# Altium PCB PCB1.PcbDoc
Units mm, origin at the board's own origin, x right, y up, seen from the top; angles counter-clockwise.
Board outline 105 x 81.5 mm, 2 copper layers (Top Layer, Bottom Layer); 36 components, 25 nets, 105 pads, 22 vias.
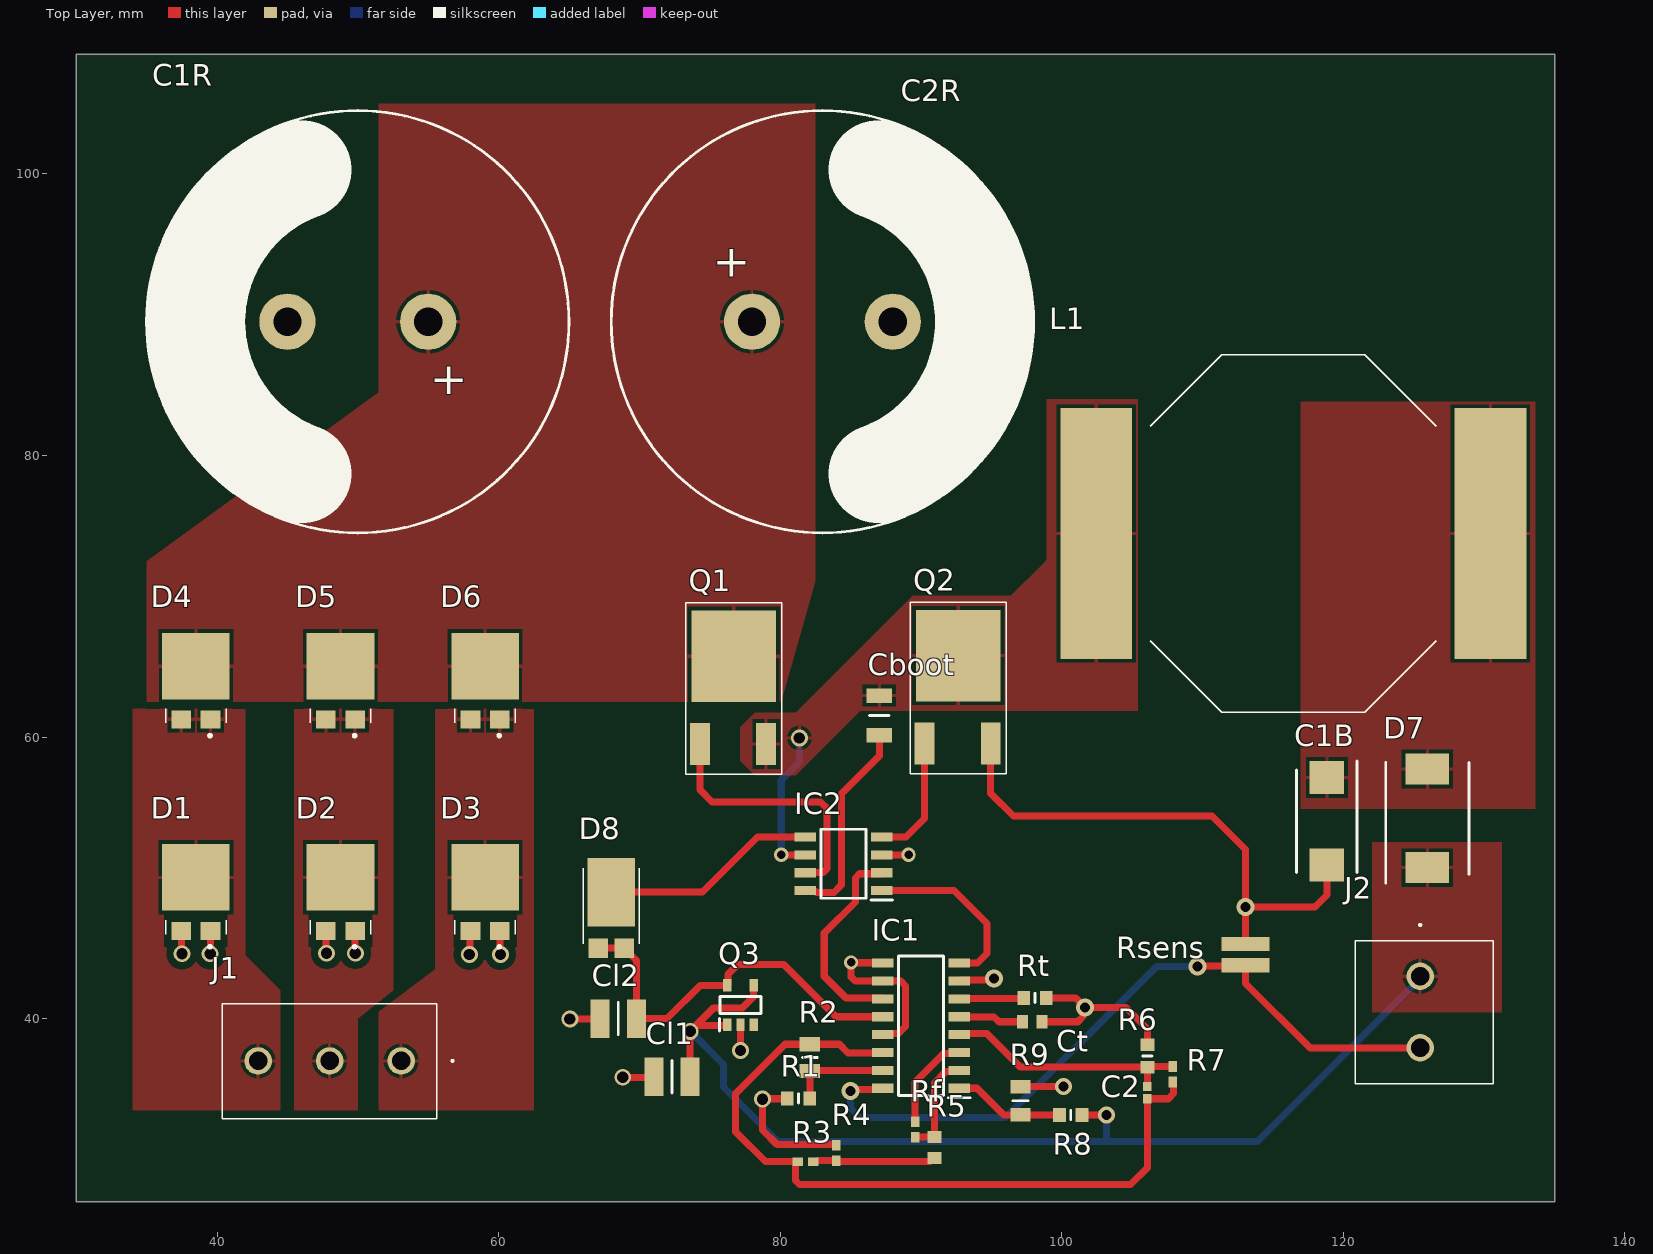
[diagram p0: Top Layer view]
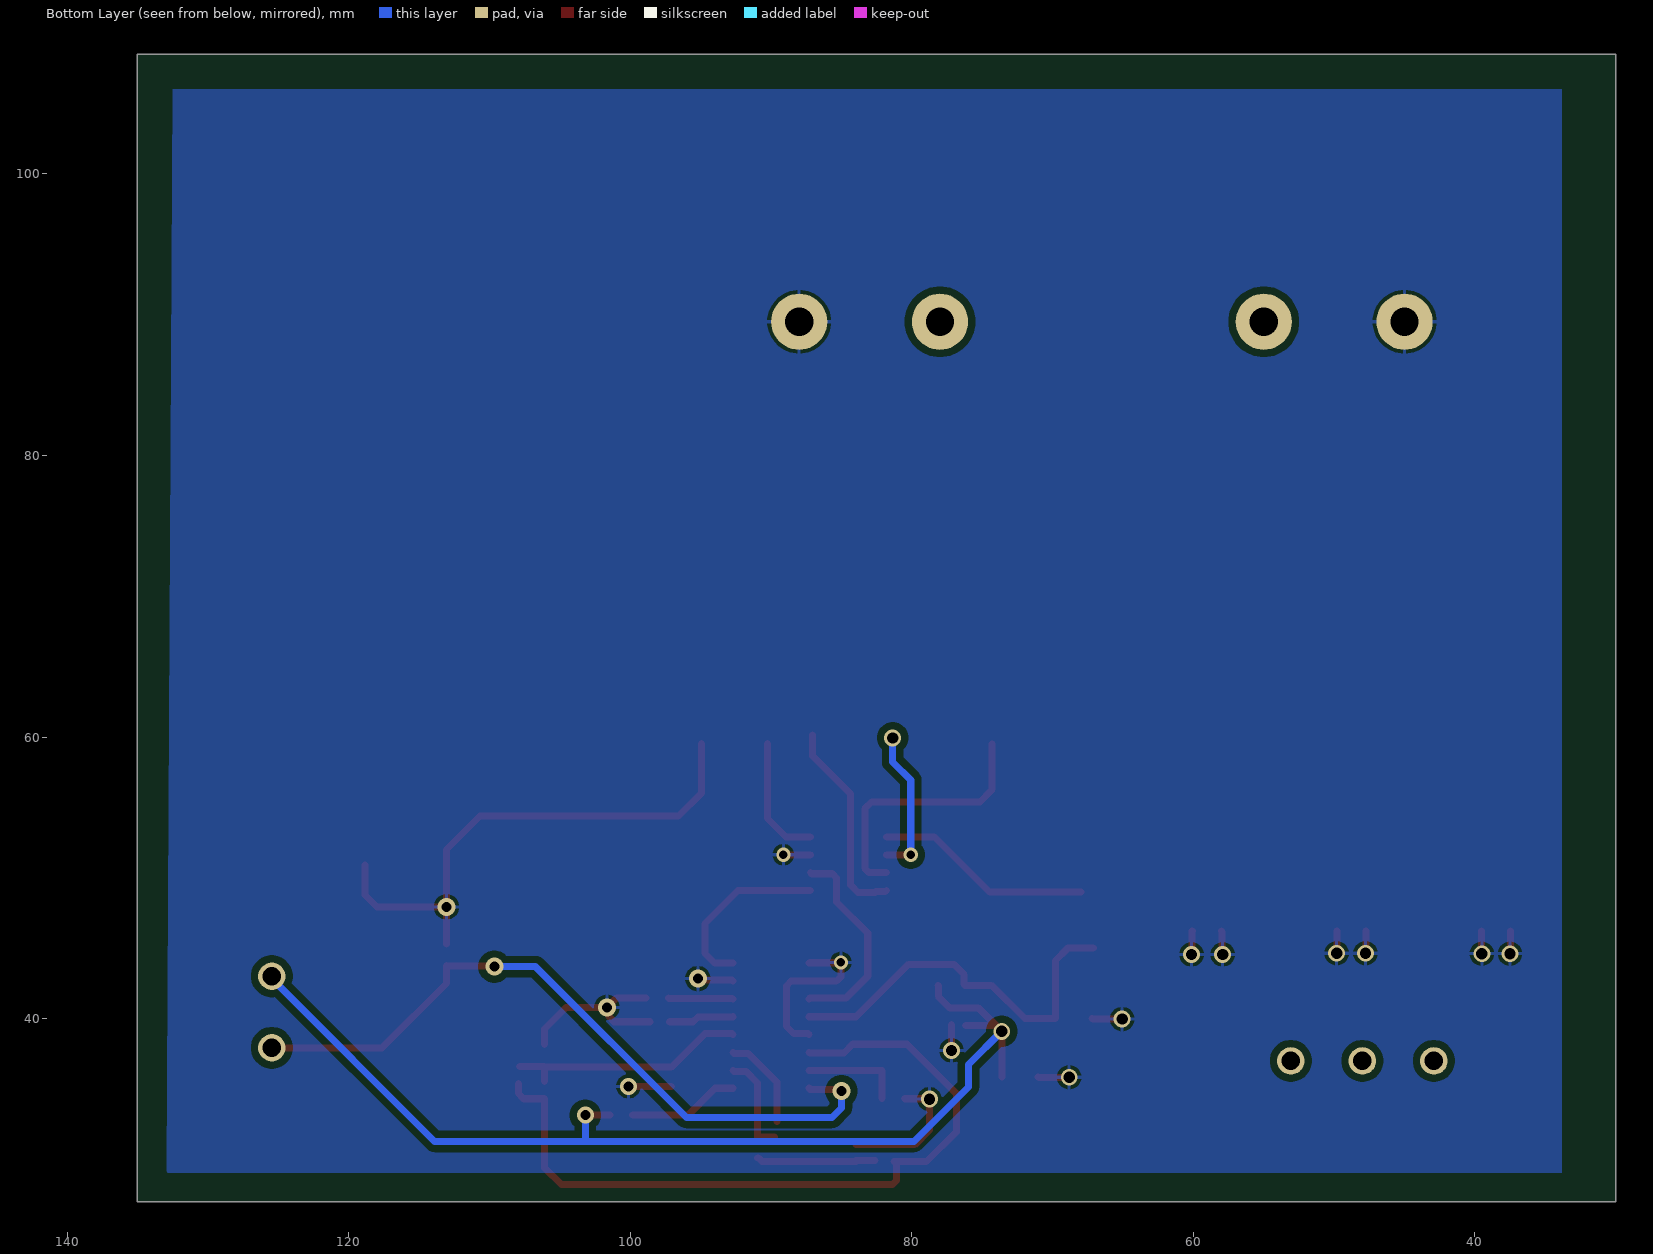
[diagram p1: Bottom Layer view, seen from below]
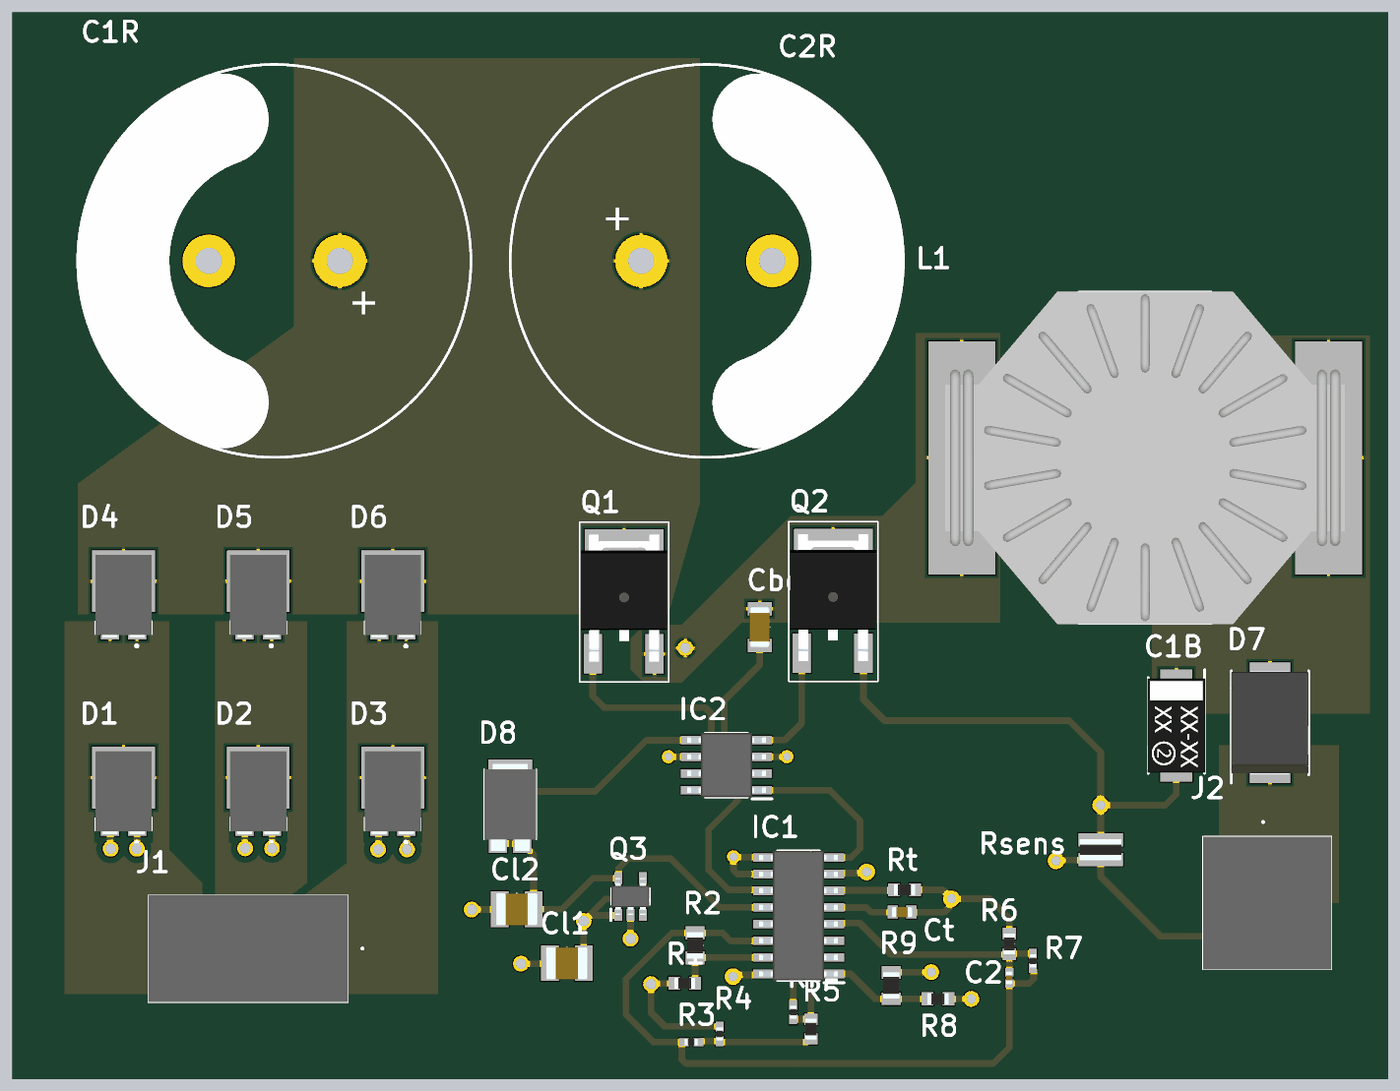
[diagram p2: 3D render of the assembled board from above, using the file's embedded part models]

## Layer stack, top to bottom
Top Solder: solder mask 0.0102, Solder Resist, Dk 3.5
Top Layer: signal copper 0.0356
Dielectric 1: dielectric 0.32, FR-4, Dk 4.8
Bottom Layer: signal copper 0.0356
Bottom Solder: solder mask 0.0102, Solder Resist, Dk 3.5

## Board outline
30,27 135,27 135,108.5 30,108.5

## Design rules (kind name [scope] priority, off if disabled: settings)
Clearance [All] p1: gap=0.5 ignorepadtopadclearanceinfootprint=FALSE
PolygonConnect [All] p1: connectstyle=Relief reliefconductorwidth=0.254 reliefentries=4 polygonreliefangle="90 Angle" airgapwidth=0.254
RoomDefinition Converter [InComponentClass('Converter')] p1: confinementstyle=ConfineIn formatcopy=TRUE lockcomponents=FALSE outline 190.846,87.63 319.151,87.63 319.151,144.78 190.846,144.78
RoomDefinition Controller [InComponentClass('Controller')] p2: confinementstyle=ConfineIn formatcopy=TRUE lockcomponents=FALSE outline 182.663,19.939 208.571,19.939 208.571,36.449 182.663,36.449
RoomDefinition Rectifier [InComponentClass('Rectifier')] p3: confinementstyle=ConfineIn formatcopy=TRUE lockcomponents=FALSE outline 216.431,5.564 324.604,5.564 324.604,66.847 216.431,66.847
RoutingVias [All] p1: holewidth=0.6 width=0.8 viastyle="Through Hole" minholewidth=0.6 minwidth=0.8 maxholewidth=0.6 maxwidth=0.8
SolderMaskExpansion [All] p1: expansion=0.102 istentingtop=FALSE
Width Width_S [All] p1: maxlimit=1 minlimit=0.3 preferedwidth=0.5
Width [All] p2: maxlimit=1.3 minlimit=0.7 preferedwidth=1
30 further rules are at their usual default settings.

## Classes and differential pairs
component class Converter: C1B D7 J2 L1 Q1 Q2 Rsens
component class Controller: C2 Cboot Cl1 Cl2 Ct D8 IC1 IC2 Q3 R1 R2 R3 R4 R5 R6 R7 R8 R9 Rf Rt
component class Rectifier: C1R C2R D1 D2 D3 D4 D5 D6 J1

## Components (designator, comment, footprint, x,y, rotation, side; value= is the part's Value field where it differs from the comment)
C1B "293D155X0050D2TE3" CAPPM7343X310N 118.83,54.02 r270 top
C1R "470uF" 450MXH270MEFCSN30X30 50,89.5 r180 top
C2 "2.2u" CAPC1005X55N 106.08,34.75 r90 top
C2R "470uF" 450MXH270MEFCSN30X30 83,89.5 r0 top
Cboot "12065D106KAT2A" CAPC3216X229N 87.04,61.54 r90 top
Cl1 "1u" CAPC3225X105N 72.32,35.87 r180 top
Cl2 "1u" CAPC3225X105N 68.5,40 r180 top
Ct "1nF" CAPC1608X90N 97.9,39.78 r0 top
D1 "AS4PJ-M3_86A" V10PN50M387A 38.5,49 r0 top
D2 "AS4PJ-M3_86A" V10PN50M387A 48.77,49 r0 top
D3 "AS4PJ-M3_86A" V10PN50M387A 59.04,49 r0 top
D4 "AS4PJ-M3_86A" V10PN50M387A 38.5,64 r0 top
D5 "AS4PJ-M3_86A" V10PN50M387A 48.77,64 r0 top
D6 "AS4PJ-M3_86A" V10PN50M387A 59.04,64 r0 top
D7 "ES3A-13-F" DIOM7959X250N 125.97,54.23 r90 top
D8 "SBR3U60P5-7" SBR3U60P57 68,47 r0 top
IC1 "TL594IDR" SOIC127P600X175-16N 90,39.5 r180 top
IC2 "NCP5181DR2G" SOIC127P600X175-8N 84.5,51 r180 top
J1 "1729131" 1729131 53.08,37 r180 top
J2 "1715721" 1715721 125.46,43.01 r270 top
L1 "PM2120-102K-RC" PM2120271KRC 116.45,74.46 r0 top
Q1 "FQD6N50CTM" DPAK3 76.7,65.75 r0 top
Q2 "FQD6N50CTM" DPAK3 92.65,65.79 r0 top
Q3 "LDO" SOT95P280X120-5N 77.18,40.97 r90 top
R1 "2k" RESC1608X55N 81.31,34.34 r180 top
R2 "48k" RESC2012X65N 82.11,37.23 r270 top
R3 "5.1k" RESC1005X40N 81.81,29.845 r0 top
R4 "5.1k" RESC1005X40N 83.98,30.47 r90 top
R5 "510" RESC1608X50N 90.95,30.84 r90 top
R6 "1k" RESC1608X55N 106.08,37.35 r270 top
R7 "9.1k" RESC1005X40N 107.88,36.05 r90 top
R8 "23.5k" RESC1608X55N 100.64,33.15 r180 top
R9 "2.5k" RESC2012X60N 97.07,34.17 r90 top
Rf "51k" RESC1005X40N 89.59,32.13 r90 top
Rsens "RCWE0612R619FKEA" RESC1632X70N 113.05,44.54 r270 top
Rt "4k" RESC1608X55N 98.09,41.48 r0 top

## Footprints (in the part's own frame and the unit in brackets; to place one, negate y for a bottom-side part, rotate by r counter-clockwise, add the part's x,y. Pads: shape width x height; smd on the part's side, far side on the other; paste and mask are expansions set on the pad)
450MXH270MEFCSN30X30 [mm]
  round 4 hole 2: 1(5,0) 2(-5,0)
  silkscreen extent -15,-15 15,15, body extent -15,-15 15,15, height 30
1715721 [mm]
  round 1.95 hole 1.3: 1(0,0) 2(5.08,0)
  silkscreen extent -3.7,-4.6 7.62,5.2, body extent -2.54,-4.6 7.62,5.2, height 14.05
1729131 [mm]
  round 1.95 hole 1.3: 1(0,0) 2(5.08,0) 3(10.16,0)
  silkscreen extent -3.7,-4.05 12.7,4.1, body extent -2.54,-4.05 12.7,4.1, height 10.25
CAPC1005X55N [mm]
  rect 0.65x0.62 smd: 1(-0.44,0) 2(0.44,0)
  body extent -0.5,-0.25 0.5,0.25, height 0.55
CAPC1608X90N [mm]
  rect 0.78x0.99 smd: 1(-0.7,0) 2(0.7,0)
  body extent -0.8,-0.41 0.8,0.41, height 0.9
CAPC3216X229N [mm]
  rect 1.02x1.82 smd: 1(-1.4,0) 2(1.4,0)
  silkscreen extent 0,-0.7 0,0.7, body extent -1.6,-0.8 1.6,0.8, height 2.29
CAPC3225X105N [mm]
  rect 1.35x2.72 smd: 1(-1.29,0) 2(1.29,0)
  silkscreen extent 0,-1.15 0,1.15, body extent -1.6,-1.25 1.6,1.25, height 1.05
CAPPM7343X310N [mm]
  rect 2.35x2.45 smd: 1(-3.1,0) 2(3.1,0)
  silkscreen extent -4.27,-2.15 3.65,2.15, body extent -3.59,-2.21 3.6,2.21, height 2.92
DIOM7959X250N [mm]
  rect 2.2x3.1 smd: 1(-3.5,0) 2(3.5,0)
  silkscreen extent -4.6,-2.95 3.97,2.95, body extent -3.97,-2.95 3.97,2.95, height 2.5
DPAK3 [mm] "MOSFET"
  rect 1.4x3 smd: 1(-2.4,-6.25) 3(2.3,-6.25)
  rect 6x6.5 smd: 4(0,0)
  silkscreen extent -3.4,-8.4 3.4,3.8, body extent -3.3,-6.85 3.28,2.85, height 2.3
PM2120271KRC [mm]
  rect 5.1x17.8 smd: 1(-14,0) 2(14,0)
  silkscreen extent -10.16,-12.7 10.16,12.7, body extent -15.25,-12.7 15.25,12.7, height 20.61
RESC1005X40N [mm]
  rect 0.75x0.6 smd: 1(-0.55,0) 2(0.55,0)
  body extent -0.5,-0.25 0.5,0.25, height 0.4
RESC1608X50N [mm]
  rect 0.85x1 smd: 1(-0.75,0) 2(0.75,0)
  body extent -0.79,-0.43 0.79,0.43, height 0.5
RESC1608X55N [mm]
  rect 0.9x1 smd: 1(-0.8,0) 2(0.8,0)
  silkscreen extent 0,-0.33 0,0.32, body extent -0.8,-0.43 0.8,0.43, height 0.55
RESC1632X70N [mm]
  rect 1x3.4 smd: 1(-0.75,0) 2(0.75,0)
  body extent -0.8,-1.6 0.8,1.6, height 0.7
RESC2012X60N [mm]
  rect 0.95x1.45 smd: 1(-1,0) 2(1,0)
  silkscreen extent 0,-0.52 0,0.53, body extent -1,-0.63 1,0.63, height 0.6
RESC2012X65N [mm]
  rect 1x1.45 smd: 1(-0.95,0) 2(0.95,0)
  silkscreen extent 0,-0.52 0,0.52, body extent -1,-0.63 1,0.63, height 0.65
SBR3U60P57 [mm]
  rect 1.39x1.4 smd: 1(-0.92,-1.991) 2(0.92,-1.991)
  rect 3.36x4.86 smd: 3(0,1.991)
  silkscreen extent -1.98,-1.68 1.98,3.68, body extent -1.98,-2.55 1.98,4.09, height 1.2
SOIC127P600X175-8N [mm]
  rect 1.525x0.65 smd: 1(-2.712,1.905) 2(-2.712,0.635) 3(-2.712,-0.635) 4(-2.712,-1.905) 5(2.712,-1.905) 6(2.712,-0.635) 7(2.712,0.635) 8(2.712,1.905)
  silkscreen extent -3.47,-2.45 1.6,2.58, body extent -3,-2.45 3,2.45, height 1.75
SOIC127P600X175-16N [mm]
  rect 1.525x0.65 smd: 1(-2.712,4.445) 2(-2.712,3.175) 3(-2.712,1.905) 4(-2.712,0.635) 5(-2.712,-0.635) 6(-2.712,-1.905) 7(-2.712,-3.175) 8(-2.712,-4.445) 9(2.712,-4.445) 10(2.712,-3.175) 11(2.712,-1.905) 12(2.712,-0.635) 13(2.712,0.635) 14(2.712,1.905) 15(2.712,3.175) 16(2.712,4.445)
  silkscreen extent -3.47,-4.95 1.6,5.12, body extent -3,-4.95 3,4.95, height 1.75
SOT95P280X120-5N [mm]
  rect 0.9x0.6 smd: 1(-1.4,0.95) 2(-1.4,0) 3(-1.4,-0.95) 4(1.4,-0.95) 5(1.4,0.95)
  silkscreen extent -1.85,-1.45 0.6,1.5, body extent -1.4,-1.45 1.4,1.45, height 1.2
V10PN50M387A [mm]
  rect 1.4x1.27 smd: 1(1.04,-2.765) 2(-1.04,-2.765)
  rect 4.8x4.72 smd: 3(0,1.04)
  silkscreen extent -2.15,-4 2.15,-2, body extent -2.15,-3.27 2.15,3.05, height 1.3

## Part data
C1B: "Capacitor Polarised", Manufacturer_Name=Vishay, Mouser Part Number=N/A, Datasheet Link=http://www.vishay.com/doc?40002, Height=3.1mm, Manufacturer_Part_Number=293D155X0050D2TE3, Mouser Price/Stock=https://www.mouser.co.uk/ProductDetail/Vishay-Sprague/293D155X0050D2TE3/?qs=dG4nGvFc7P9fHhfu7ckfoQ%3D%3D
C1R C2R: library part 450MXH270MEFCSN30X30
C2: library part C0402C225K9PACTU, "Capacitor", Manufacturer_Name=Kemet, Mouser Part Number=80-C0402C225K9P, Arrow Part Number=C0402C225K9PACTU, Arrow Price/Stock=https://www.arrow.com/en/products/c0402c225k9pactu/kemet-corporation, Datasheet Link=https://content.kemet.com/datasheets/KEM_C1002_X7R_SMD.pdf, Height=0.55mm, Manufacturer_Part_Number=C0402C225K9PACTU, Mouser Price/Stock=https://www.mouser.co.uk/ProductDetail/KEMET/C0402C225K9PACTU/?qs=7hO1d5R1VgvbvfUaNq9%252BYQ%3D%3D
Cboot: "Capacitor", Manufacturer_Name=AVX, Mouser Part Number=581-12065D106KAT2A, Arrow Part Number=12065D106KAT2A, Arrow Price/Stock=https://www.arrow.com/en/products/12065d106kat2a/avx, Datasheet Link=http://datasheets.avx.com/cx5r.pdf, Height=2.29mm, Manufacturer_Part_Number=12065D106KAT2A, Mouser Price/Stock=https://www.mouser.co.uk/ProductDetail/AVX/12065D106KAT2A?qs=KdTYp8tcPglFZs244%2FIMaw%3D%3D
Cl1 Cl2: library part 885012209047, "Capacitor", Manufacturer_Name="Wurth Elektronik", Mouser Part Number=710-885012209047, Datasheet Link=https://katalog.we-online.com/pbs/datasheet/885012209047.pdf, Height=1.05mm, Manufacturer_Part_Number=885012209047, Mouser Price/Stock=https://www.mouser.co.uk/ProductDetail/Wurth-Elektronik/885012209047/?qs=0KOYDY2FL29YEbVS2nM5KQ%3D%3D
Ct: library part 06031C102KAZ2A, "Capacitor", Manufacturer_Name=AVX, Mouser Part Number=581-06031C102KAZ2A, Datasheet Link=https://componentsearchengine.com/Datasheets/1/06031A100FAT2A.pdf, Height=0.9mm, Manufacturer_Part_Number=06031C102KAZ2A, Mouser Price/Stock=https://www.mouser.co.uk/ProductDetail/AVX/06031C102KAZ2A?qs=ahudlVbFbatc7%2FoXGMS0PQ%3D%3D
D1 D2 D3 D4 D5 D6: "Diode", Arrow Part Number=AS4PJ-M3/86A, Manufacturer_Name=Vishay, Mouser Part Number=625-AS4PJ-M3/86A, Arrow Price/Stock=https://www.arrow.com/en/products/as4pj-m386a/vishay, Datasheet Link=http://www.vishay.com/docs/88770/as4pd.pdf, Height=1.2mm, Manufacturer_Part_Number=AS4PJ-M3/86A, Mouser Price/Stock=https://www.mouser.co.uk/ProductDetail/Vishay-Semiconductors/AS4PJ-M3-86A?qs=z5NHsHGj0DEO4GI4Od5axw%3D%3D
D7: "Diode", Manufacturer_Name="Diodes Inc.", Mouser Part Number=621-ES3A-F, Arrow Part Number=ES3A-13-F, Arrow Price/Stock=https://www.arrow.com/en/products/es3a-13-f/diodes-incorporated, Datasheet Link=https://www.arrow.com/en/products/es3a-13-f/diodes-incorporated, Height=2.5mm, Manufacturer_Part_Number=ES3A-13-F, Mouser Price/Stock=https://www.mouser.co.uk/ProductDetail/Diodes-Incorporated/ES3A-13-F/?qs=fsGQ151tk6Wkygd1WaXOlQ%3D%3D
D8: "Schottky Diode", Manufacturer_Name="Diodes Inc.", Mouser Part Number=621-SBR3U60P5-7, Arrow Part Number=SBR3U60P5-7, Arrow Price/Stock=https://www.arrow.com/en/products/sbr3u60p5-7/diodes-incorporated, Datasheet Link=https://www.mouser.com/datasheet/2/115/SBR3U60P5-941054.pdf, Height=1.1mm, Manufacturer_Part_Number=SBR3U60P5-7, Mouser Price/Stock=https://www.mouser.co.uk/ProductDetail/Diodes-Incorporated/SBR3U60P5-7/?qs=nJRy1mI8RR%252BxxKqfP%2FhEGg%3D%3D
IC1: "Integrated Circuit", Manufacturer_Name="Texas Instruments", Mouser Part Number=595-TL594IDR, Arrow Part Number=TL594IDR, Arrow Price/Stock=https://www.arrow.com/en/products/tl594idr/texas-instruments, Datasheet Link=http://www.ti.com/lit/gpn/TL594, Height=1.75mm, Manufacturer_Part_Number=TL594IDR, Mouser Price/Stock=https://www.mouser.co.uk/ProductDetail/Texas-Instruments/TL594IDR/?qs=odmYgEirbwx2xq08uKs%2FLA%3D%3D
IC2: "Integrated Circuit", Manufacturer_Name="ON Semiconductor", Mouser Part Number=863-NCP5181DR2G, Arrow Part Number=NCP5181DR2G, Arrow Price/Stock=https://www.arrow.com/en/products/ncp5181dr2g/on-semiconductor, Datasheet Link=http://www.onsemi.com/pub/Collateral/NCP5181-D.PDF, Height=1.75mm, Manufacturer_Part_Number=NCP5181DR2G, Mouser Price/Stock=https://www.mouser.co.uk/ProductDetail/ON-Semiconductor/NCP5181DR2G/?qs=OSf9jACorvZepnMsAKlxsQ%3D%3D
J1: "Connector", Manufacturer_Name="Phoenix Contact", Mouser Part Number=651-1729131, Datasheet Link=https://componentsearchengine.com/Datasheets/2/1729131.pdf, Height=10.15mm, Manufacturer_Part_Number=1729131, Mouser Price/Stock=https://www.mouser.co.uk/ProductDetail/Phoenix-Contact/1729131/?qs=GFUSqQMLmmkspw%2F%2FW6PC3g%3D%3D
J2: "Connector", Manufacturer_Name="Phoenix Contact", Mouser Part Number=651-1715721, Arrow Part Number=1715721, Arrow Price/Stock=https://www.arrow.com/en/products/1715721/phoenix-contact, Datasheet Link=https://componentsearchengine.com/Datasheets/2/1715721.pdf, Height=13.95mm, Manufacturer_Part_Number=1715721, Mouser Price/Stock=https://www.mouser.co.uk/ProductDetail/Phoenix-Contact/1715721/?qs=BYlwlsDsB%2FqgmKyTCSucHg%3D%3D
L1: "Inductor", Manufacturer_Name=Bourns, Datasheet Link=https://www.bourns.com/pdfs/pm2120_series.pdf, Height=20.32mm, Manufacturer_Part_Number=PM2120-102K-RC
Q1 Q2: "Transistor, Mosfet, N-Channel, 500V V(Br)Dss, 4.5A I(D), To-252Aa", Case/Package=DPAK, Continuous Drain Current (ID)=4.5A, Drain to Source Breakdown Voltage=500V, Drain to Source Resistance=1.2R, Gate to Source Voltage (Vgs)=30V, Manufacturer="ON Semiconductor / Fairchild", Max Operating Temperature=150°C, Max Power Dissipation=2.5W, Min Operating Temperature=-55°C, Package Quantity=1, Supplier Part Number 1=FQD6N50CTMCT-ND, Input Capacitance=700pF, Category=MOSFETs, ComponentLink1Description=https://datasheet.ciiva.com/11175/fqd6n50c-11175856.pdf?src-supplier=Avnet, ComponentLink1URL=https://datasheet.ciiva.com/11175/fqd6n50c-11175856.pdf?src-supplier=Avnet, ComponentLink2Description=https://datasheet.ciiva.com/4445/fqd6n50c-110706-4445904.pdf?src-supplier=Mouser, ComponentLink2URL=https://datasheet.ciiva.com/4445/fqd6n50c-110706-4445904.pdf?src-supplier=Mouser, ComponentLink3Description=https://datasheet.ciiva.com/26791/fqd6n50ctm-26791044.pdf?src-supplier=IIIC, ComponentLink3URL=https://datasheet.ciiva.com/26791/fqd6n50ctm-26791044.pdf?src-supplier=IIIC, Current Rating=4.5A, Drain to Source Voltage (Vdss)=500V, Element Configuration=Single, Fall Time=45ns, Lead Free="Lead Free", Manufacturer Part Number=FQD6N50CTM, Mount="Surface Mount", Number of Elements=1, Number of Pins=3, Packaging="Tape and Reel", Power Dissipation=2.5W, Pricing 1="1=0,95000, 10=0,77600, 25=0,76200, 100=0,60380, 500=0,51176, 1000=0,41688 (USD)", Radiation Hardening=No, Rds On Max=1.2R, Rise Time=35ns, RoHS=Yes, Stock 1=650, Supplier 1=Digi-Key, Turn-Off Delay Time=55ns, Turn-On Delay Time=10ns, Voltage Rating (DC)=500V, Weight=0.26037g
Q3: library part XC6210B302MR-G, "Transistor", Manufacturer_Name=Torex, Mouser Part Number=865-XC6210B302MR-G, Datasheet Link=https://componentsearchengine.com/Datasheets/1/XC6210B302MR-G.pdf, Height=1.2mm, Manufacturer_Part_Number=XC6210B302MR-G, Mouser Price/Stock=https://www.mouser.co.uk/ProductDetail/Torex-Semiconductor/XC6210B302MR-G?qs=AsjdqWjXhJ%2F8LVwdgROYaw%3D%3D
R1 R6: library part RCA060310R0FKEAHP, "Resistor", Manufacturer_Name=Vishay, Arrow Part Number=RCA060310R0FKEAHP, Arrow Price/Stock=https://www.arrow.com/en/products/rca060310r0fkeahp/vishay, Datasheet Link=https://www.vishay.com/docs/20067/rcahp.pdf, Height=0.55mm, Manufacturer_Part_Number=RCA060310R0FKEAHP
R2: library part CPF0805B49K9E1, "Resistor", Manufacturer_Name="TE Connectivity", Mouser Part Number=279-CPF0805B49K9E1, Datasheet Link=http://docs-europe.electrocomponents.com/webdocs/13d1/0900766b813d116f.pdf, Height=0.65mm, Manufacturer_Part_Number=CPF0805B49K9E1, Mouser Price/Stock=https://www.mouser.co.uk/ProductDetail/TE-Connectivity-Holsworthy/CPF0805B49K9E1/?qs=iJVBkmKXgrkcN8Razl5GKw%3D%3D
R3 R4: library part CRCW04025K10JNED, "Resistor", Manufacturer_Name=Vishay, Mouser Part Number=71-CRCW0402J-5.1K-E3, Arrow Part Number=CRCW04025K10JNED, Arrow Price/Stock=https://www.arrow.com/en/products/crcw04025k10jned/vishay, Datasheet Link=http://www.vishay.com/docs/20035/dcrcwe3.pdf, Height=0.4mm, Manufacturer_Part_Number=CRCW04025K10JNED, Mouser Price/Stock=https://www.mouser.co.uk/ProductDetail/Vishay-Dale/CRCW04025K10JNED/?qs=DKbL89i6OEozZLVEbDGZhw%3D%3D
R5: library part CRCW0603510RJNEA, "Resistor", Manufacturer_Name=Vishay, Mouser Part Number=71-CRCW0603J-510-E3, Arrow Part Number=CRCW0603510RJNEA, Arrow Price/Stock=https://www.arrow.com/en/products/crcw0603510rjnea/vishay, Datasheet Link=http://www.vishay.com/docs/20035/dcrcwe3.pdf, Height=0.5mm, Manufacturer_Part_Number=CRCW0603510RJNEA, Mouser Price/Stock=https://www.mouser.co.uk/ProductDetail/Vishay-Dale/CRCW0603510RJNEA/?qs=F8Fiu5nZiPjhir5Uy48eTQ%3D%3D
R7: library part CRCW04029K10JNED, "Resistor", Manufacturer_Name=Vishay, Mouser Part Number=71-CRCW0402J-9.1K-E3, Datasheet Link=http://www.vishay.com/docs/20035/dcrcwe3.pdf, Height=0.4mm, Manufacturer_Part_Number=CRCW04029K10JNED, Mouser Price/Stock=https://www.mouser.co.uk/ProductDetail/Vishay-Dale/CRCW04029K10JNED/?qs=lxmYmG9KtX%2FHs4nfN6Hr1A%3D%3D
R8 Rt: library part MCT06030C2352FP500, "Resistor", Manufacturer_Name=Vishay, Mouser Part Number=N/A, Datasheet Link=http://www.vishay.com/docs/28705/mcx0x0xpro.pdf, Height=0.55mm, Manufacturer_Part_Number=MCT06030C2352FP500, Mouser Price/Stock=https://www.mouser.co.uk/ProductDetail/Vishay-Beyschlag/MCT06030C2352FP500/?qs=iuLH8FrUFAt7r3RaJxlO0Q%3D%3D
R9: library part RN732ATTD2501B25, "Resistor", Manufacturer_Name="KOA Speer", Mouser Part Number=660-RN732ATTD2501B25, Arrow Part Number=RN732ATTD2501B25, Arrow Price/Stock=https://www.arrow.com/en/products/rn732attd2501b25/koa-speer-electronics, Datasheet Link=https://www.mouser.fr/datasheet/2/219/RN73-11994.pdf, Height=0.6mm, Manufacturer_Part_Number=RN732ATTD2501B25, Mouser Price/Stock=https://www.mouser.co.uk/ProductDetail/KOA-Speer/RN732ATTD2501B25/?qs=PieNiMrGZlrhcfEc14mnog%3D%3D
Rf: library part MCMR04X5102FTL, "Resistor", Manufacturer_Name=MULTICOMP, Datasheet Link=http://www.farnell.com/datasheets/1716707.pdf, Height=0.4mm, Manufacturer_Part_Number=MCMR04X5102FTL
Rsens: "Resistor", Manufacturer_Name=Vishay, Mouser Part Number=71-RCWE0612R619FKEA, Arrow Part Number=RCWE0612R619FKEA, Arrow Price/Stock=https://www.arrow.com/en/products/rcwe0612r619fkea/vishay, Datasheet Link=https://componentsearchengine.com/Datasheets/2/RCWE0612R619FKEA.pdf, Height=0.7mm, Manufacturer_Part_Number=RCWE0612R619FKEA, Mouser Price/Stock=https://www.mouser.co.uk/ProductDetail/Vishay-Dale/RCWE0612R619FKEA/?qs=bvCpHSZmQjl4FfGNZ007qQ%3D%3D

## Via types
v1: diameter 1.2, hole 0.8, Top Layer to Bottom Layer, 12 vias
v2: diameter 1.27, hole 0.711, Top Layer to Bottom Layer, 5 vias
v3: diameter 1, hole 0.6, Top Layer to Bottom Layer, 3 vias
v4: diameter 1.2, hole 0.7, Top Layer to Bottom Layer, 2 vias

## Nets (pads, with @x,y where several pads share a name; then routed paths per layer and width w, separated by ;. In a path a pad name is that pad's centre, name@x,y a point inside that pad or via, vN(x,y) a via of type N, cw(c..) or ccw(c..) an arc to the next point about the centre after c; other vN are vias at no path point)
1IN+: IC1.1 R8.2 R9.1 | length 7.9
  Top Layer w0.5: IC1.1 93.975,35.055 95.88,33.15 97.05,33.15 97.06,33.16 99.83,33.16 R8.2
1IN-: IC1.2 R5.2 Rf.1 | length 7.2
  Top Layer w0.5: Rf.1@89.76,31.595 90.945,31.595 R5.2 90.95,35.441 91.759,36.25 92.637,36.25 IC1.2
2IN+: IC1.16 J2.2 Rsens.2 | length 52
  Top Layer w0.5: v2(85,34.85) 85.13,34.98 87.213,34.98 IC1.16 ; v2(109.65,43.69) 109.7,43.74 113,43.74 Rsens.2 113.05,42.5 117.62,37.93 J2.2
  Bottom Layer w0.5: v2(85,34.85) 85,33.66 85.68,32.98 96.011,32.98 106.721,43.69 v2(109.65,43.69)
2IN-: IC1.15 R1.1 R2.2 | length 7.1
  Top Layer w0.5: R1.1 R2.2 82.133,36.302 87.266,36.302 IC1.15
18V: Cl2.1 D8.1 D8.2 IC1.12 Q3.5 | length 28.3
  Top Layer w0.5: D8.1 D8.2 68.92,45.004 69.79,44.134 Cl2.1 71.96,40 74.33,42.37 Q3.5 76.28,42.42 76.28,43.13 77.01,43.86 80.24,43.86 83.965,40.135 IC1.12
24V+: Cl1.1 D7.1 J2.1 Q3.1 Q3.4 R8.1 | length 76.1
  Top Layer w0.5: Cl1.1 v1(73.61,39.1) ; v1(73.61,39.1) 75.28,40.77 77.32,40.77 78.12,41.57 78.12,42.36 Q3.4 ; 74.219,39.52 Q3.1@76.18,39.52 ; R8.1 v4(103.19,33.15)
  Bottom Layer w0.5: v1(73.61,39.1) 75.967,36.744 75.967,35.151 79.838,31.28 103.19,31.28 ; v4(103.19,33.15) 103.19,31.28 ; J2.1 125.46,42.84 113.9,31.28 103.19,31.28
BRIDGE: Cboot.2 IC2.6 L1.1 Q1.3 Q2.4 | length 10.5
  Top Layer w0.5: v3(80.075,51.64) 80.078,51.637 81.786,51.637 IC2.6
  Bottom Layer w0.5: v3(80.075,51.64) 80.075,56.955 81.36,58.24 v1(81.36,59.94)
C1: IC1.8 IC2.1 | length 12.8
  Top Layer w0.5: IC2.1 92.345,49.095 94.69,46.75 94.69,44.633 94.002,43.945 IC1.8
DRV_HI: IC2.7 Q1.1 | length 18.8
  Top Layer w0.5: Q1.1 74.29,59.49 74.29,56.27 75.165,55.395 82.86,55.395 83.34,54.915 83.34,50.658 83.047,50.365 IC2.7
DRV_LO: IC2.4 Q2.1 | length 8.9
  Top Layer w0.5: IC2.4 88.945,52.905 90.25,54.21 Q2.1
DTC: C2.2 IC1.4 R6.2 R7.2 | length 17.2
  Top Layer w0.5: IC1.4 92.777,38.93 94.69,38.93 97.07,36.55 R6.2 ; 106.08,35.53 R6.2 ; R7.2 106.13,36.6 R6.2
FB: IC1.3 Rf.2 | length 6.8
  Top Layer w0.5: Rf.2 89.59,35.495 91.615,37.52 92.637,37.52 IC1.3
NetC1B_1: C1B.1 D7.2 L1.2
NetCt_1: Ct.1 IC1.5 | length 4.6
  Top Layer w0.5: IC1.5 92.727,40.12 95.2,40.12 95.54,39.78 Ct.1
NetD1_3: D1.3 D4.1 D4.2 J1.3
NetD2_3: D2.3 D5.1 D5.2 J1.2
NetD3_3: D3.3 D6.1 D6.2 J1.1
NetD8_3: D8.3 IC2.5 | length 15.4
  Top Layer w0.5: D8.3 74.491,48.991 78.395,52.895 81.778,52.895 IC2.5
NetIC1_11: IC1.11 IC2.2 | length 14.7
  Top Layer w0.5: IC2.2 87.137,50.29 85.633,50.29 85.34,49.997 85.34,48.28 83.13,46.07 83.13,43.01 84.66,41.48 87.213,41.48 IC1.11
NetR3_2: R3.2 R4.1 R5.1 | length 8.4
  Top Layer w0.5: R3.2@82.62,29.92 R4.1 ; R4.1@83.98,29.845 90.63,29.845 90.875,30.09 R5.1
NetRt_1: IC1.6 Rt.1 | length 4.6
  Top Layer w0.5: IC1.6 92.75,41.442 97.252,41.442 Rt.1
Rectifier+: C1R.2 C2R.2 D4.3 D5.3 D6.3 Q1.4
Rectifier-: C1B.2 C1R.1 C2R.1 Cl1.2 Cl2.2 Ct.2 D1.1 D1.2 D2.1 D2.2 D3.1 D3.2 IC1.7 IC1.9 IC1.10 IC1.13 IC2.3 Q2.3 Q3.2 R1.2 R4.2 R6.1 R9.2 Rsens.1 Rt.2 | length 96.9
  Top Layer w0.5: D1.2 37.486,46.209 37.486,44.638 v1(37.512,44.612) ; v1(39.512,44.612) 39.526,44.626 39.526,46.221 D1.1 ; D2.2 47.756,46.209 47.756,44.668 v1(47.782,44.642) ; D2.1 49.816,46.229 49.816,44.648 v1(49.822,44.642) ; v1(57.92,44.56) 57.96,44.6 57.96,46.195 D3.2 ; D3.1 60.105,46.21 60.105,44.585 v1(60.13,44.56) ; v1(65.06,39.97) 67.18,39.97 Cl2.2 ; v1(68.821,35.835) 70.995,35.835 Cl1.2 ; Q3.2 v1(77.18,37.74) v1@77.314,37.606 ; R1.2 80.479,34.309 78.779,34.309 v1(78.748,34.278) 78.748,32.092 79.795,31.045 R4.2@83.98,31.045 ; IC2.3 87.216,51.639 89.113,51.639 v3(89.117,51.643) ; IC1.13 87.363,38.94 88.41,38.94 88.91,39.44 88.91,42.33 88.57,42.67 87.293,42.67 IC1.10 85.335,42.675 85.037,42.973 v3(85.037,43.993) 85.061,43.969 87.264,43.969 IC1.9 ; IC1.7 92.787,42.75 95.11,42.75 v2(95.2,42.84) ; Q2.3 94.95,56.01 96.56,54.4 110.67,54.4 113.05,52.02 v2(113.05,47.94) ; R9.2 97.08,35.18 100.12,35.18 v4(100.13,35.19) ; Ct.2 101.136,39.78 101.513,40.157 101.513,40.653 v2(101.66,40.8) ; Rt.2 100.98,41.48 v2(101.66,40.8) ; R6.1 106.08,39.27 104.55,40.8 v2(101.66,40.8) ; Rsens.1 v2(113.05,47.94) ; C1B.2 118.83,48.79 117.98,47.94 v2(113.05,47.94)
REF: C2.1 IC1.14 R2.1 R3.1 R7.1 | length 54.7
  Top Layer w0.5: R3.1 R3.1@81.09,29.845 ; IC1.14 87.263,37.57 84.83,37.57 84.22,38.18 R2.1 80.34,38.18 76.84,34.68 76.84,31.96 78.955,29.845 R3.1@81.09,29.845 ; R7.1@107.95,35.38 107.95,34.68 107.58,34.31 C2.1 106.08,29.41 104.89,28.22 81.383,28.22 81.09,28.513 R3.1@81.09,29.845
VBOOT: Cboot.1 IC2.8 | length 14.6
  Top Layer w0.5: IC2.8 81.863,49.02 82.533,49.02 82.593,48.96 83.81,48.96 84.34,49.49 84.34,55.95 87.04,58.65 Cboot.1
pads on no net: Q3.3

## Polygon pours and split planes (outlines as drawn)
24V+ on Top Layer "24V+_L01_P014" (solid, pour order 14): 122.06,52.53 131.24,52.53 131.24,52.19 131.24,52.02 131.24,40.46 122.06,40.46
NetC1B_1 on Top Layer "NETC1B_1_L01_P013" (solid, pour order 13): 116.966,54.91 133.62,54.91 133.62,83.81 133.28,83.81 132.6,83.81 116.966,83.81
NetD2_3 on Top Layer "NETD2_3_L01_P003" (solid, pour order 3): 45.5,33.5 50,33.5 50,40 52.5,42 52.5,62 45.5,62
NetD1_3 on Top Layer "NETD1_3_L01_P002" (solid, pour order 2): 44.5,33.5 34,33.5 34,62 42,62 42,44.5 44.5,42
Rectifier+ on Top Layer "RECTIFIER+_L01_P000" (solid, pour order 0): 51,105.5 51.5,105 51.5,84.5 35,72.5 35,62.5 80.07,62.5 82.5,71.06 82.5,105 51.5,105
NetD3_3 on Top Layer "NETD3_3_L01_P004" (solid, pour order 4): 51.5,33.5 51.5,40.5 55.5,43.5 55.5,62 62.5,62 62.5,33.5
BRIDGE on Top Layer "BRIDGE_L01_P011" (solid, pour order 11): 98.94,83.98 105.4,83.98 105.4,61.88 85.68,61.88 81.09,57.29 78.2,57.29 77.18,58.31 77.18,60.69 78.2,61.71 81.09,61.71 89.42,70.04 96.39,70.04 98.6,72.25 98.94,72.59
Rectifier- on Bottom Layer "RECTIFIER-_L02_P016" (solid, pour order 16): 132.505,106.005 132.93,29.07 33.83,29.07 33.83,106.005

## Silkscreen, mask and mechanical layers (free items; w line width, h text height)
Mechanical 1:
  lines w0.254: 30.161,21.506 30.161,22.014 ; 31.685,21.252 30.161,21.76 ; 31.685,22.268 30.161,21.76 ; 76.923,21.76 30.161,21.76 ; 88.4,21.76 135.161,21.76 ; 133.637,21.252 135.161,21.76 ; 133.637,22.268 135.161,21.76 ; 135.161,21.506 135.161,22.014 ; 139.572,28.35 140.08,26.826 ; 139.572,107.302 140.08,108.826 ; 139.826,26.826 140.334,26.826 ; 139.826,108.826 140.334,108.826 ; 140.08,62.722 140.08,26.826 ; 140.08,72.93 140.08,108.826 ; 140.588,28.35 140.08,26.826 ; 140.588,107.302 140.08,108.826 ; 29.92,27.03 134.98,27.03 134.98,108.46 29.92,108.46 29.92,27.03
  text "82 (mm)" at 140.994,62.976 h1.52 r90
  text "105 (mm)" at 77.177,20.846 h1.52

## Text inside footprints (layer, text, board x,y; h text height)
C1R: Top Overlay "+" at 57.8,87.1 h4 r180; Top Layer "7.5mm" at 47.2,166.083 h1.52 r180
C2R: Top Overlay "+" at 75.2,91.9 h4